# Altium PCB Bus Module.PcbDoc
Units mm, origin at the board's own origin, x right, y up, seen from the top; angles counter-clockwise.
Board outline 50 x 50 mm, 2 copper layers (Top Layer, Bottom Layer); 2 components, 26 nets, 282 pads, 72 vias.
Unrouted connection lines stored in the file: 32.
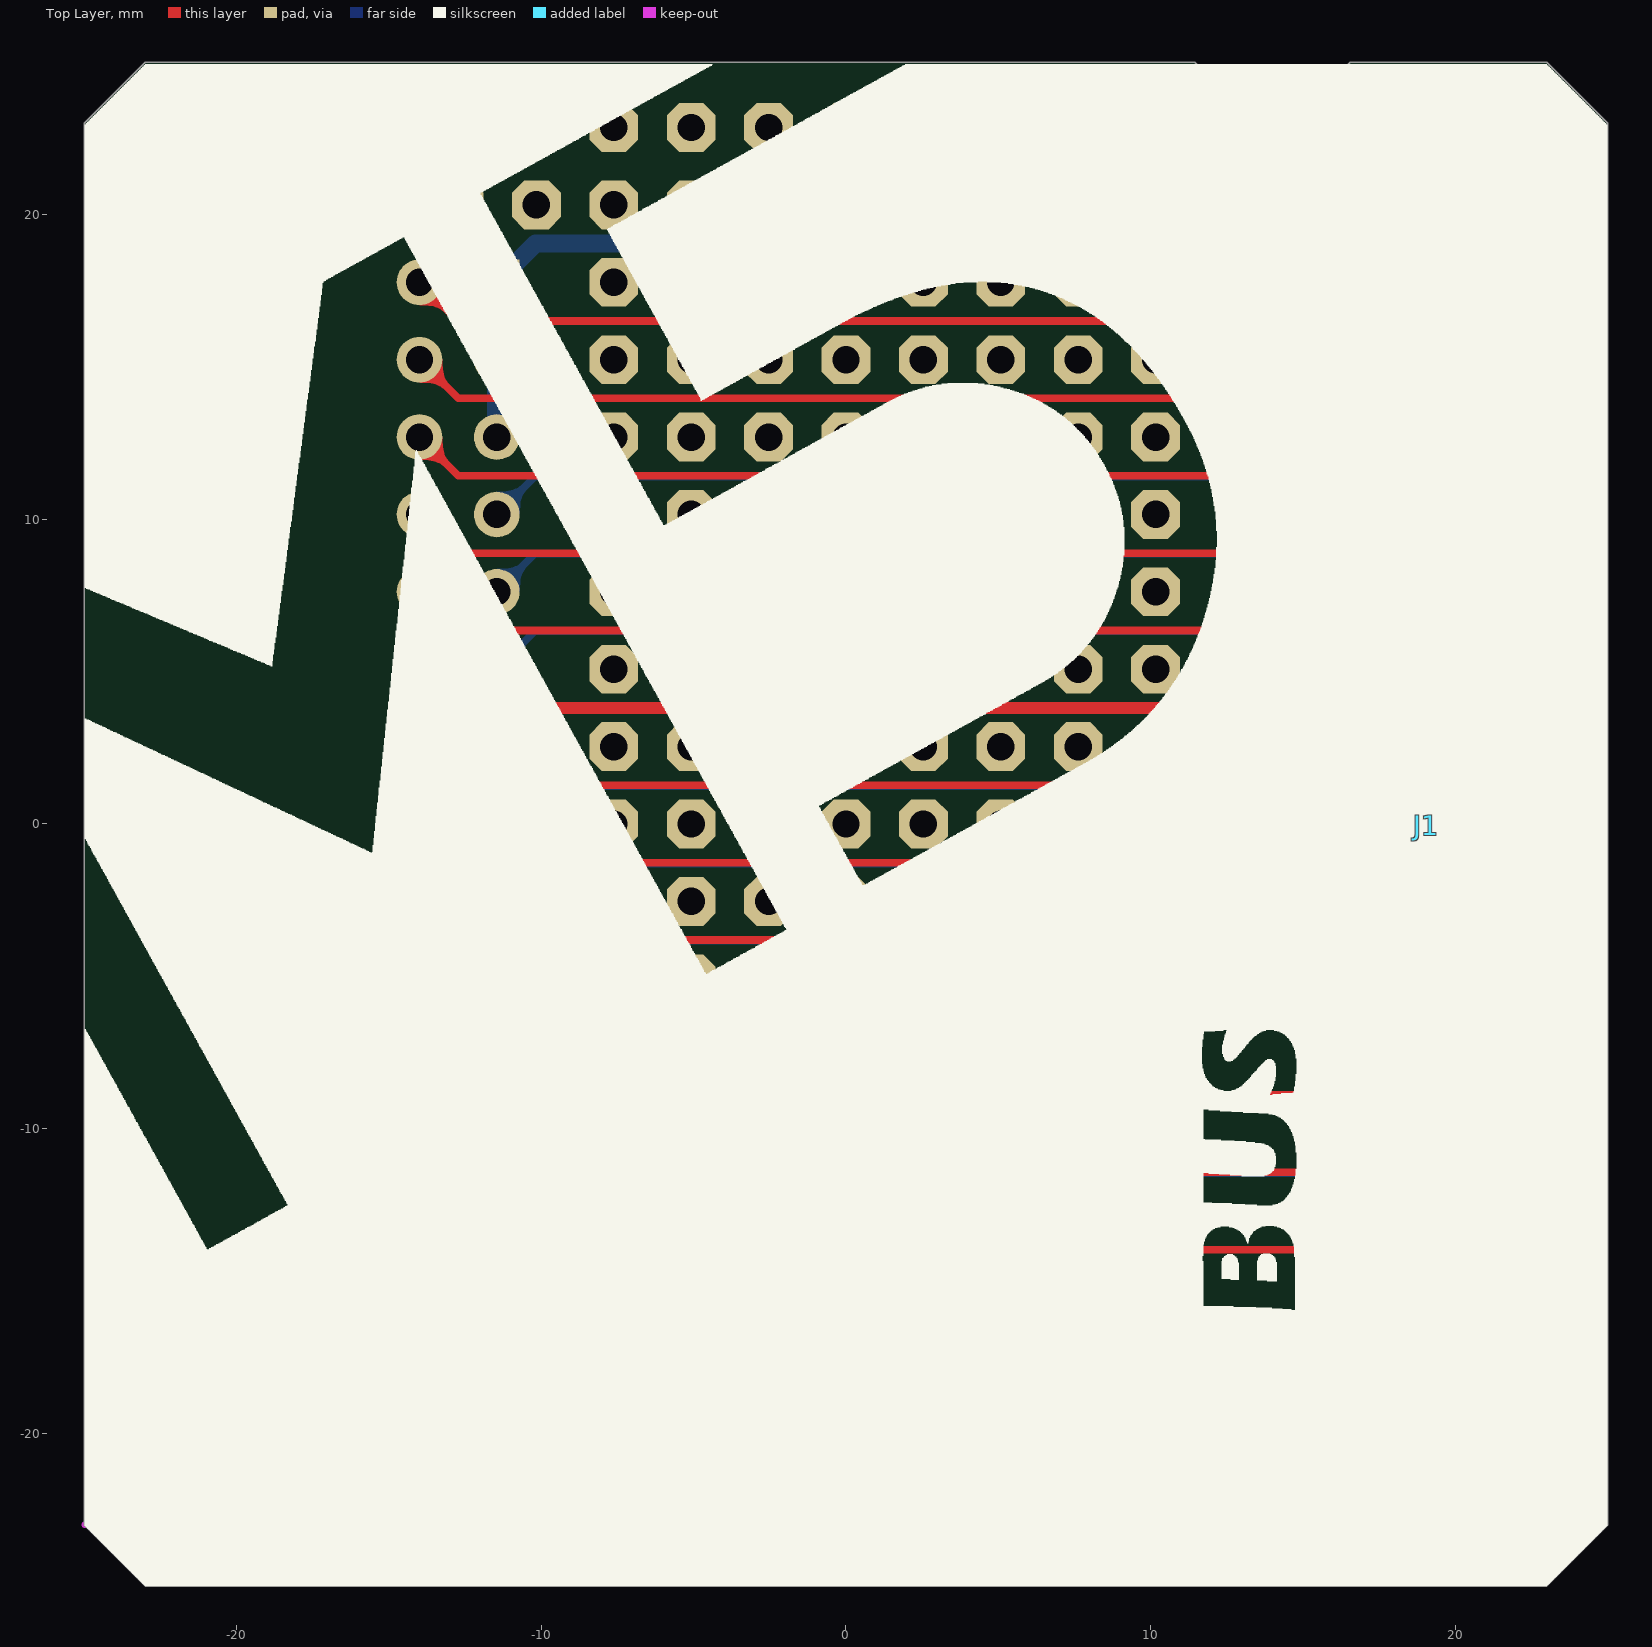
[diagram p0: Top Layer view]
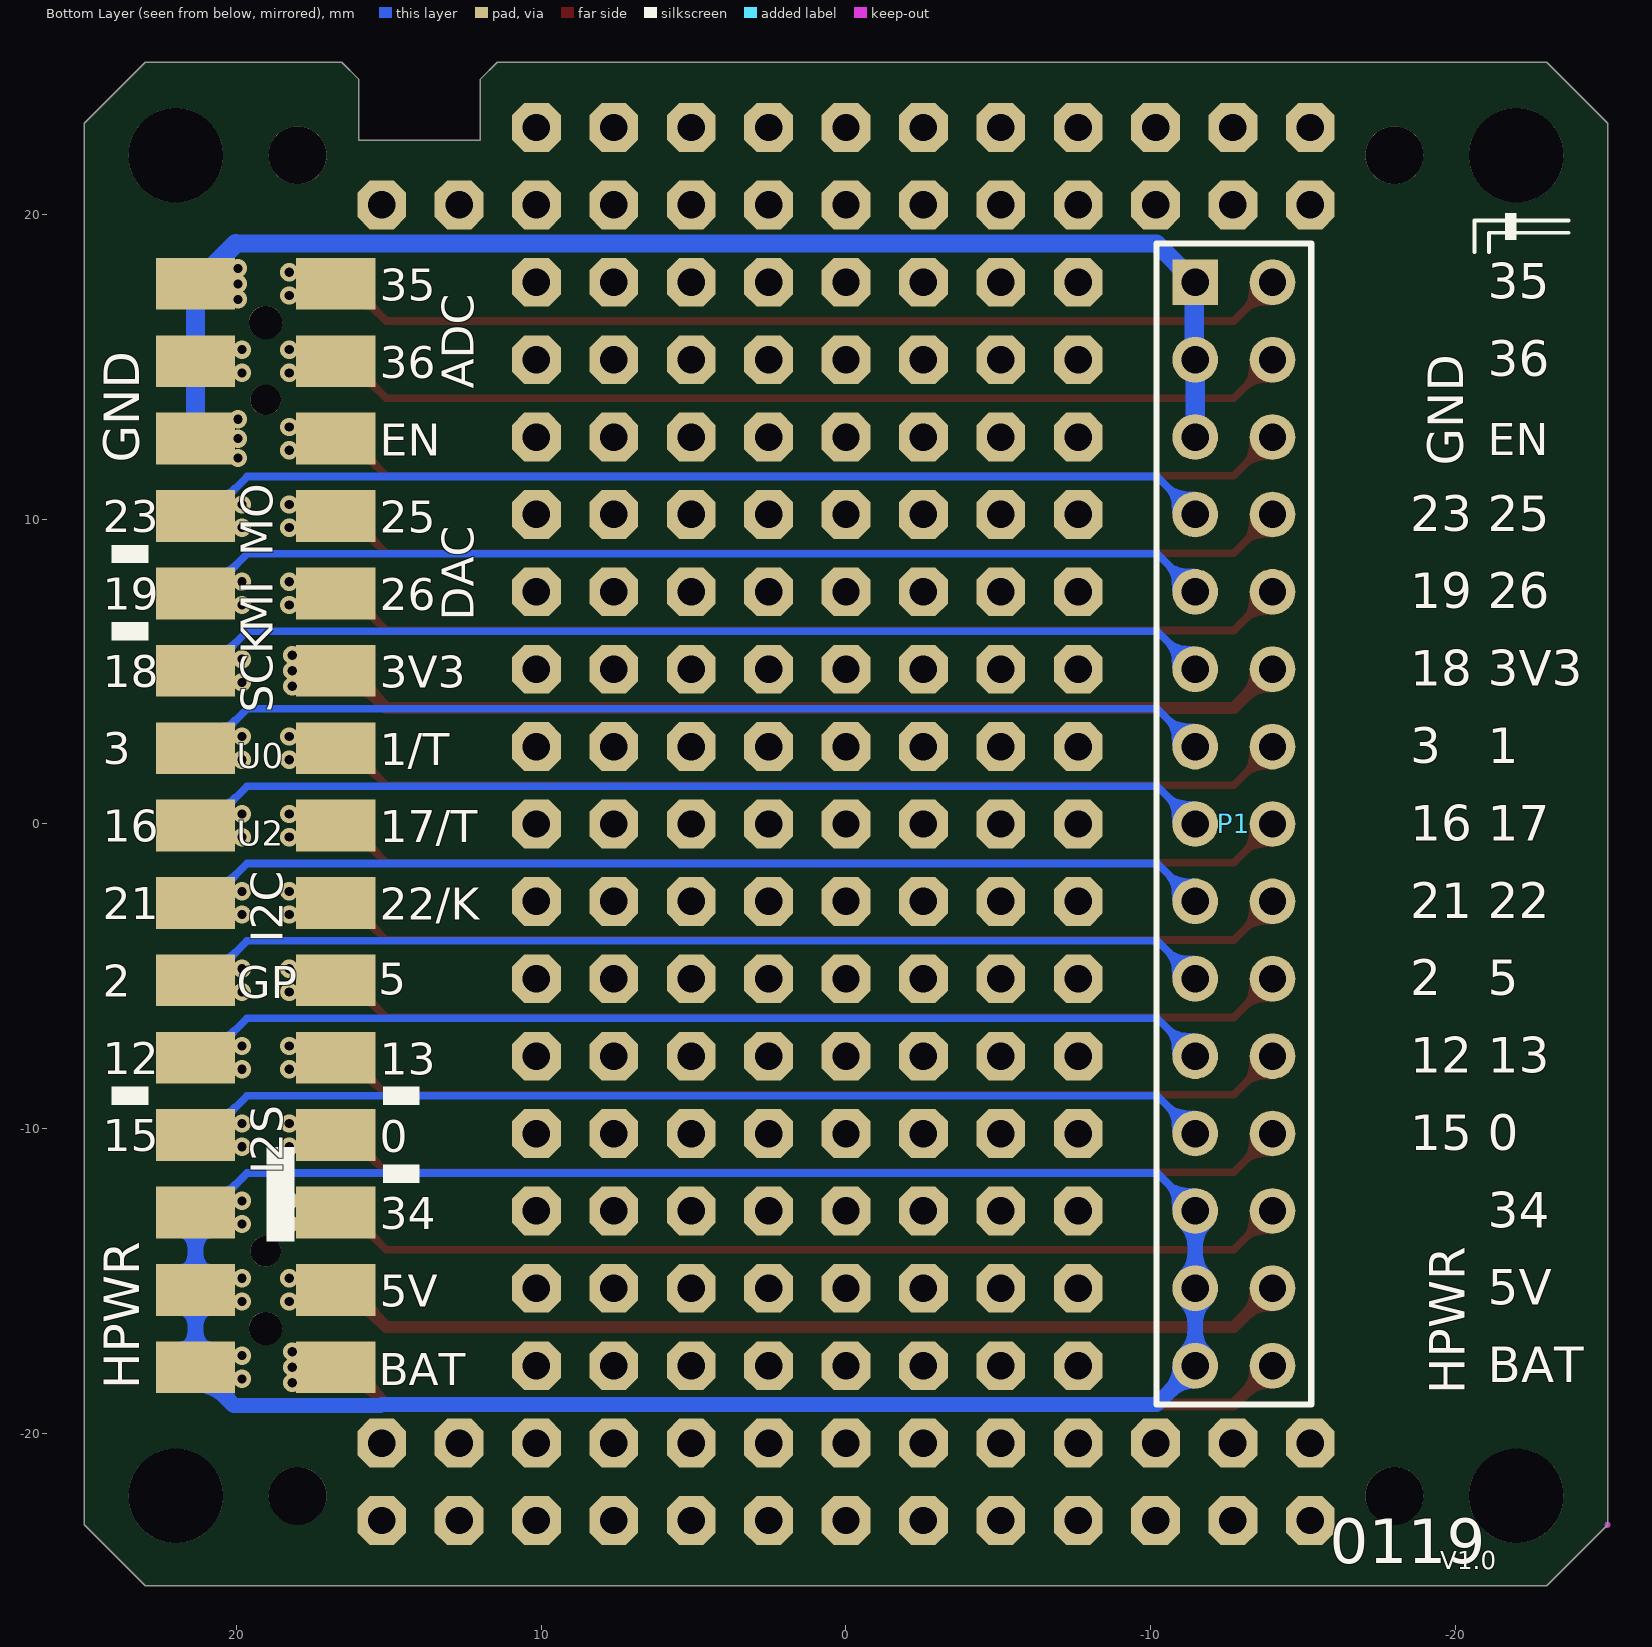
[diagram p1: Bottom Layer view, seen from below]

## Layer stack, top to bottom
Top Solder: solder mask 0.0102, Solder Resist, Dk 3.5
Top Layer: signal copper 0.0356
Dielectric1: dielectric 0.32, FR-4, Dk 4.8
Bottom Layer: signal copper 0.0356
Bottom Solder: solder mask 0.0102, Solder Resist, Dk 3.5

## Board outline
-25,-23 -23,-25 23,-25 25,-23 25,23 23,25 16.551,25 16,24.449 16,22.449 12,22.449 12,24.449 11.449,25 -23,25 -25,23

## Design rules (kind name [scope] priority, off if disabled: settings)
Clearance [All] p1: gap=0.152 ignorepadtopadclearanceinfootprint=FALSE except(0: Arc-Hole Track-Hole SMDPad-Hole THPad-Hole Via-Hole Fill-Hole Poly-Hole Region-Hole Text-Hole)
PlaneConnect [All] p1: planeconnectstyle=Direct reliefexpansion=0.508 reliefentries=4 reliefconductorwidth=0.254 reliefairgap=0.254
PolygonConnect [All] p1: connectstyle=Direct reliefconductorwidth=0.254 reliefentries=4 polygonreliefangle="90 Angle" airgapwidth=0.254
RoutingVias [All] p1: holewidth=0.711 width=1.27 viastyle="Through Hole" minholewidth=0.711 minwidth=1.27 maxholewidth=0.711 maxwidth=1.27
SolderMaskExpansion [All] p1: expansion=0.102
Width [All] p1: maxlimit=0.635 minlimit=0.152 preferedwidth=0.381 minimp=50.000000 maximp=50.000000 favimp=50.000000
29 further rules are at their usual default settings.

## Components (designator, comment, footprint, x,y, rotation, side; value= is the part's Value field where it differs from the comment)
J1 "M5Stack_BUS" M5Stack_BUS_30P 21.35,17.729 r0 top locked
P1 "Header 15X2" HDR2X15 -11.46,17.78 r270 bottom locked

## Footprints (in the part's own frame and the unit in brackets; to place one, negate y for a bottom-side part, rotate by r counter-clockwise, add the part's x,y. Pads: shape width x height; smd on the part's side, far side on the other; paste and mask are expansions set on the pad)
HDR2X15 [mm] "Connector; Header; 15x2 Position"
  rect 1.5x1.5 hole 0.9: 1(0,0)
  round 1.5 hole 0.9: 2(0,2.54) 3(2.54,0) 4(2.54,2.54) 5(5.08,0) 6(5.08,2.54) 7(7.62,0) 8(7.62,2.54) 9(10.16,0) 10(10.16,2.54) 11(12.7,0) 12(12.7,2.54) 13(15.24,0) 14(15.24,2.54) 15(17.78,0) 16(17.78,2.54) 17(20.32,0) 18(20.32,2.54) 19(22.86,0) 20(22.86,2.54) 21(25.4,0) 22(25.4,2.54) 23(27.94,0) 24(27.94,2.54) 25(30.48,0) 26(30.48,2.54) 27(33.02,0) 28(33.02,2.54) 29(35.56,0) 30(35.56,2.54)
  silkscreen extent -1.27,-1.27 36.83,3.81
M5Stack_BUS_30P [mm]
  round 1 hole 1: 0(-2.3,-3.81) 0(-2.3,-31.75)
  round 1.1 hole 1.1: 0(-2.3,-1.27) 0(-2.3,-34.29)
  rect 2.6x1.7 smd: 1(0,0) 2(-4.6,0) 3(0,-2.54) 4(-4.6,-2.54) 5(0,-5.08) 6(-4.6,-5.08) 7(0,-7.62) 8(-4.6,-7.62) 9(0,-10.16) 10(-4.6,-10.16) 11(0,-12.7) 12(-4.6,-12.7) 13(0,-15.24) 14(-4.6,-15.24) 15(0,-17.78) 16(-4.6,-17.78) 17(0,-20.32) 18(-4.6,-20.32) 19(0,-22.86) 20(-4.6,-22.86) 21(0,-25.4) 22(-4.6,-25.4) 23(0,-27.94) 24(-4.6,-27.94) 25(0,-30.48) 26(-4.6,-30.48) 27(0,-33.02) 28(-4.6,-33.02) 29(0,-35.56) 30(-4.6,-35.56)
  rect 2.6x1.7 smd far side: 1(0,0) 2(-4.6,0) 3(0,-2.54) 4(-4.6,-2.54) 5(0,-5.08) 6(-4.6,-5.08) 7(0,-7.62) 8(-4.6,-7.62) 9(0,-10.16) 10(-4.6,-10.16) 11(0,-12.7) 12(-4.6,-12.7) 13(0,-15.24) 14(-4.6,-15.24) 15(0,-17.78) 16(-4.6,-17.78) 17(0,-20.32) 18(-4.6,-20.32) 19(0,-22.86) 20(-4.6,-22.86) 21(0,-25.4) 22(-4.6,-25.4) 23(0,-27.94) 24(-4.6,-27.94) 25(0,-30.48) 26(-4.6,-30.48) 27(0,-33.02) 28(-4.6,-33.02) 29(0,-35.56) 30(-4.6,-35.56)

## Part data
P1: "Header, 15-Pin, Dual row", LatestRevisionDate=17-Jul-2002, LatestRevisionNote="Re-released for DXP Platform.", Publisher="Altium Limited"

## Free pads (board coordinates)
  round 3.1 hole 3.1: 0(-22,-22.051) 0(-22,21.949) 0(22,-22.051) 0(22,21.949)
  round 1.9 hole 1.9: 0(-18,-22.051) 0(-18,21.949) 0(18,-22.051) 0(18,21.949)
  oct 1.6x1.6 hole 0.9: 0(-15.24,-22.86) 0(-15.24,-20.32) 0(-15.24,20.32) 0(-15.24,22.86) 0(-12.7,-22.86) 0(-12.7,-22.86) 0(-12.7,-20.32) 0(-12.7,-20.32) 0(-12.7,20.32) 0(-12.7,20.32) 0(-12.7,22.86) 0(-12.7,22.86) 0(-10.16,-22.86) 0(-10.16,-22.86) 0(-10.16,-20.32) 0(-10.16,-20.32) 0(-10.16,20.32) 0(-10.16,20.32) 0(-10.16,22.86) 0(-10.16,22.86) 0(-7.62,-22.86) 0(-7.62,-22.86) 0(-7.62,-20.32) 0(-7.62,-20.32) 0(-7.62,-17.78) 0(-7.62,-15.24) 0(-7.62,-12.7) 0(-7.62,-10.16) 0(-7.62,-7.62) 0(-7.62,-5.08) 0(-7.62,-2.54) 0(-7.62,0) 0(-7.62,2.54) 0(-7.62,5.08) 0(-7.62,7.62) 0(-7.62,10.16) 0(-7.62,12.7) 0(-7.62,15.24) 0(-7.62,17.78) 0(-7.62,20.32) 0(-7.62,22.86) 0(-5.08,-22.86) 0(-5.08,-20.32) 0(-5.08,-17.78) 0(-5.08,-15.24) 0(-5.08,-12.7) 0(-5.08,-10.16) 0(-5.08,-7.62) 0(-5.08,-5.08) 0(-5.08,-2.54) 0(-5.08,0) 0(-5.08,2.54) 0(-5.08,5.08) 0(-5.08,7.62) 0(-5.08,10.16) 0(-5.08,12.7) 0(-5.08,15.24) 0(-5.08,17.78) 0(-5.08,20.32) 0(-5.08,22.86) 0(-2.54,-22.86) 0(-2.54,-20.32) 0(-2.54,-17.78) 0(-2.54,-15.24) 0(-2.54,-12.7) 0(-2.54,-10.16) 0(-2.54,-7.62) 0(-2.54,-5.08) 0(-2.54,-2.54) 0(-2.54,0) 0(-2.54,2.54) 0(-2.54,5.08) 0(-2.54,7.62) 0(-2.54,10.16) 0(-2.54,12.7) 0(-2.54,15.24) 0(-2.54,17.78) 0(-2.54,20.32) 0(-2.54,22.86) 0(0,-22.86) 0(0,-20.32) 0(0,-17.78) 0(0,-15.24) 0(0,-12.7) 0(0,-10.16) 0(0,-7.62) 0(0,-5.08) 0(0,-2.54) 0(0,0) 0(0,2.54) 0(0,5.08) 0(0,7.62) 0(0,10.16) 0(0,12.7) 0(0,15.24) 0(0,17.78) 0(0,20.32) 0(0,22.86) 0(2.54,-22.86) 0(2.54,-20.32) 0(2.54,-17.78) 0(2.54,-15.24) 0(2.54,-12.7) 0(2.54,-10.16) 0(2.54,-7.62) 0(2.54,-5.08) 0(2.54,-2.54) 0(2.54,0) 0(2.54,2.54) 0(2.54,5.08) 0(2.54,7.62) 0(2.54,10.16) 0(2.54,12.7) 0(2.54,15.24) 0(2.54,17.78) 0(2.54,20.32) 0(2.54,22.86) 0(5.08,-22.86) 0(5.08,-20.32) 0(5.08,-17.78) 0(5.08,-15.24) 0(5.08,-12.7) 0(5.08,-10.16) 0(5.08,-7.62) 0(5.08,-5.08) 0(5.08,-2.54) 0(5.08,0) 0(5.08,2.54) 0(5.08,5.08) 0(5.08,7.62) 0(5.08,10.16) 0(5.08,12.7) 0(5.08,15.24) 0(5.08,17.78) 0(5.08,20.32) 0(5.08,22.86) 0(7.62,-22.86) 0(7.62,-20.32) 0(7.62,-17.78) 0(7.62,-15.24) 0(7.62,-12.7) 0(7.62,-10.16) 0(7.62,-7.62) 0(7.62,-5.08) 0(7.62,-2.54) 0(7.62,0) 0(7.62,2.54) 0(7.62,5.08) 0(7.62,7.62) 0(7.62,10.16) 0(7.62,12.7) 0(7.62,15.24) 0(7.62,17.78) 0(7.62,20.32) 0(7.62,22.86) 0(10.16,-22.86) 0(10.16,-20.32) 0(10.16,-17.78) 0(10.16,-15.24) 0(10.16,-12.7) 0(10.16,-10.16) 0(10.16,-7.62) 0(10.16,-5.08) 0(10.16,-2.54) 0(10.16,0) 0(10.16,2.54) 0(10.16,5.08) 0(10.16,7.62) 0(10.16,10.16) 0(10.16,12.7) 0(10.16,15.24) 0(10.16,17.78) 0(10.16,20.32) 0(10.16,22.86) 0(12.7,-22.86) 0(12.7,-20.32) 0(12.7,20.32) 0(15.24,-22.86) 0(15.24,-20.32) 0(15.24,20.32)

## Via types
v1: diameter 0.6, hole 0.3, Top Layer to Bottom Layer, tented both sides, 72 vias

## Nets (pads, with @x,y where several pads share a name; then routed paths per layer and width w, separated by ;. In a path a pad name is that pad's centre, name@x,y a point inside that pad or via, vN(x,y) a via of type N, cw(c..) or ccw(c..) an arc to the next point about the centre after c; other vN are vias at no path point)
3.3V: J1.12 P1.12 | length 31.8
  Top Layer w0.4: P1.12 -12.73,3.81 15.088,3.81 16.307,5.029 J1.12@16.75,5.029
  other v1: 18.175,4.521 18.175,5.029 18.175,5.537
5V: J1.28 P1.28 | length 31.8
  Top Layer w0.4: P1.28 -12.73,-16.51 15.088,-16.51 16.307,-15.291 J1.28@16.75,-15.291
  other v1: 18.274,-15.672 18.274,-14.91
BATTERY: J1.30 P1.30 | length 31.8
  Top Layer w0.4: P1.30 -12.73,-19.05 15.088,-19.05 16.307,-17.831 J1.30@16.75,-17.831
  other v1: 18.175,-18.339 18.175,-17.831 18.175,-17.323
EN: J1.6 P1.6 | length 31.8
  Top Layer w0.254: P1.6 -12.73,11.43 15.088,11.43 16.307,12.649 J1.6@16.75,12.649
  other v1: 18.274,12.268 18.274,12.268 18.274,13.03 18.274,13.03
GND: J1.1 J1.3 J1.5 P1.1 P1.3 P1.5 | length 44.1
  Bottom Layer w0.6: P1.1@-11.43,17.81 -10.19,19.05 20.029,19.05
  Bottom Layer w0.635: P1.5 P1.3 -11.43,15.27 -11.43,17.81 P1.1 ; 20.029,19.05 21.35,17.729 21.35,15.189 J1.5@21.35,12.649
  other v1: 19.953,12.014 19.953,12.649 19.953,13.284 19.826,14.808 19.826,15.57 19.953,17.221 19.953,17.729 19.953,18.237
GPIO0: J1.24 P1.24 | length 31.8
  Top Layer w0.254: P1.24 -12.73,-11.43 15.088,-11.43 16.307,-10.211 J1.24@16.75,-10.211
  other v1: 18.274,-10.592 18.274,-9.83
GPIO1: J1.14 P1.14 | length 31.8
  Top Layer w0.254: P1.14 -12.73,1.27 15.088,1.27 16.307,2.489 J1.14@16.75,2.489
  other v1: 18.274,2.108 18.274,2.87
GPIO2: J1.19 P1.19 | length 33.9
  Bottom Layer w0.25: P1.19 -10.215,-3.835 19.66,-3.835 20.955,-5.131 J1.19@21.35,-5.131
  other v1: 19.826,-5.512 19.826,-4.75
GPIO3: J1.13 P1.13 | length 33.9
  Bottom Layer w0.25: P1.13 -10.215,3.785 19.66,3.785 20.955,2.489 J1.13@21.35,2.489
  other v1: 19.826,2.108 19.826,2.87
GPIO5: J1.20 P1.20 | length 31.8
  Top Layer w0.254: P1.20 -12.73,-6.35 15.088,-6.35 16.307,-5.131 J1.20@16.75,-5.131
  other v1: 18.274,-5.512 18.274,-4.75
GPIO12: J1.21 P1.21 | length 33.9
  Bottom Layer w0.25: P1.21 -10.215,-6.375 19.66,-6.375 20.955,-7.671 J1.21@21.35,-7.671
  other v1: 19.826,-8.052 19.826,-7.29
GPIO13: J1.22 P1.22 | length 31.8
  Top Layer w0.254: P1.22 -12.73,-8.89 15.088,-8.89 16.307,-7.671 J1.22@16.75,-7.671
  other v1: 18.274,-8.052 18.274,-7.29
GPIO15: J1.23 P1.23 | length 33.9
  Bottom Layer w0.25: P1.23 -10.215,-8.915 19.66,-8.915 20.955,-10.211 J1.23@21.35,-10.211
  other v1: 19.826,-10.592 19.826,-9.83
GPIO16: J1.15 P1.15 | length 33.9
  Bottom Layer w0.25: P1.15 -10.215,1.245 19.66,1.245 20.955,-0.051 J1.15@21.35,-0.051
  other v1: 19.826,-0.432 19.826,0.33
GPIO17: J1.16 P1.16 | length 31.8
  Top Layer w0.254: P1.16 -12.73,-1.27 15.088,-1.27 16.307,-0.051 J1.16@16.75,-0.051
  other v1: 18.274,-0.432 18.274,0.33
GPIO18: J1.11 P1.11 | length 33.9
  Bottom Layer w0.25: P1.11 -10.215,6.325 19.66,6.325 20.955,5.029 J1.11@21.35,5.029
  other v1: 19.826,4.648 19.826,5.41
GPIO19: J1.9 P1.9 | length 33.9
  Bottom Layer w0.25: P1.9 -10.215,8.865 19.66,8.865 20.955,7.569 J1.9@21.35,7.569
  other v1: 19.826,7.188 19.826,7.188 19.826,7.95 19.826,7.95
GPIO21: J1.17 P1.17 | length 33.9
  Bottom Layer w0.25: P1.17 -10.215,-1.295 19.66,-1.295 20.955,-2.591 J1.17@21.35,-2.591
  other v1: 19.826,-2.972 19.826,-2.21
GPIO22: J1.18 P1.18 | length 31.8
  Top Layer w0.254: P1.18 -12.73,-3.81 15.088,-3.81 16.307,-2.591 J1.18@16.75,-2.591
  other v1: 18.274,-2.972 18.274,-2.21
GPIO23: J1.7 P1.7 | length 33.9
  Bottom Layer w0.25: P1.7 -10.215,11.405 19.66,11.405 20.955,10.109 J1.7@21.35,10.109
  other v1: 19.826,9.728 19.826,9.728 19.826,10.49 19.826,10.49
GPIO25: J1.8 P1.8 | length 31.8
  Top Layer w0.254: P1.8 -12.73,8.89 15.088,8.89 16.307,10.109 J1.8@16.75,10.109
  other v1: 18.274,9.728 18.274,9.728 18.274,10.49 18.274,10.49
GPIO26: J1.10 P1.10 | length 31.8
  Top Layer w0.254: P1.10 -12.73,6.35 15.088,6.35 16.307,7.569 J1.10@16.75,7.569
  other v1: 18.274,7.188 18.274,7.95
GPIO34: J1.26 P1.26 | length 31.8
  Top Layer w0.254: P1.26 -12.73,-13.97 15.088,-13.97 16.307,-12.751 J1.26@16.75,-12.751
  other v1: 18.274,-13.132 18.274,-12.37
GPIO35: J1.2 P1.2 | length 31.8
  Top Layer w0.254: P1.2 -12.73,16.51 15.088,16.51 16.307,17.729 J1.2@16.75,17.729
  other v1: 18.274,17.348 18.274,18.11
GPIO36: J1.4 P1.4 | length 31.8
  Top Layer w0.254: P1.4 -12.73,13.97 15.088,13.97 16.307,15.189 J1.4@16.75,15.189
  other v1: 18.274,14.808 18.274,15.57
HPWR: J1.25 J1.27 J1.29 P1.25 P1.27 P1.29 | length 77.9
  Bottom Layer w0.25: P1.25 -10.215,-11.455 19.66,-11.455 20.955,-12.751 J1.25@21.35,-12.751
  Bottom Layer w0.5: P1.25 P1.27 P1.29 -10.19,-19.05 15.25,-19.05 15.283,-19.083 20.098,-19.083 21.35,-17.831 21.35,-15.291 J1.25@21.35,-12.751
  other v1: 19.826,-18.212 19.826,-17.45 19.826,-15.672 19.826,-14.91 19.826,-13.132 19.826,-12.37
pads on no net: J1.0

## Keep-outs
Keep-Out Layer:
  lines w0.2: -25,-23 -25,-23

## Silkscreen, mask and mechanical layers (free items; w line width, h text height)
Top Overlay:
  drawing of 5550 lines, arcs and shapes, not listed
Bottom Overlay:
  region: -21.996,19.177 -21.996,20.041 -21.641,20.041 -21.641,19.177
  lines w0.127: -23.724,19.406 -21.107,19.406 -21.107,18.771 ; -23.724,19.812 -20.625,19.812 -20.625,18.771
  text "35" at -21.057,16.84 h2
  text "36" at -21.057,14.3 h2
  text "EN" at -21.057,11.76 h1.8
  text "GND" at -20.65,11.76 h2 r270
  text "25" at -21.057,9.22 h2
  text "23" at -18.517,9.22 h2
  text "26" at -21.057,6.68 h2
  text "19" at -18.517,6.68 h2
  text "3V3" at -21.057,4.14 h2
  text "18" at -18.517,4.14 h2
  text "1" at -21.057,1.6 h2
  text "3" at -18.517,1.6 h2
  text "17" at -21.057,-0.94 h2
  text "16" at -18.517,-0.94 h2
  text "22" at -21.057,-3.48 h2
  text "21" at -18.517,-3.48 h2
  text "5" at -21.057,-6.02 h2
  text "2" at -18.517,-6.02 h2
  text "13" at -21.057,-8.56 h2
  text "12" at -18.517,-8.56 h2
  text "0" at -21.057,-11.1 h2
  text "15" at -18.517,-11.1 h2
  text "34" at -21.057,-13.64 h2
  text "5V" at -21.057,-16.18 h2
  text "BAT" at -21.057,-18.72 h2
  text "HPWR" at -20.701,-18.72 h2 r270
  text "V1.0" at -19.507,-24.663 h1
  text "0119" at -15.875,-24.74 h2.5
Mechanical 1:
  lines w0.127: -25,-23 -25,23 -23,25 11.449,25 12,24.449 12,22.449 16,22.449 16,24.449 16.551,25 23,25 25,23 25,-23 23,-25 -23,-25 -25,-23 ; 0,-25 0,-25

## Text inside footprints (layer, text, board x,y; h text height)
J1: Bottom Overlay "5" at 15.35,-5.951 h1.8; Bottom Overlay "BAT" at 15.342,-18.771 h1.8; Bottom Overlay "3V3" at 15.3,4.129 h1.8; Bottom Overlay "I2S" at 18.15,-11.501 h1.8 r270; Bottom Overlay "26" at 15.3,6.669 h1.8; Bottom Overlay "EN" at 15.3,11.749 h1.8; Bottom Overlay "21" at 24.4,-3.471 h1.8; Bottom Overlay "25" at 15.3,9.209 h1.8; Bottom Overlay "13" at 15.3,-8.571 h1.8; Bottom Overlay "23" at 24.4,9.229 h1.8; Bottom Overlay "12" at 24.4,-8.551 h1.8; Bottom Overlay "U2" at 20,-0.991 h1.4; Bottom Overlay "35" at 15.3,16.829 h1.8; Bottom Overlay "18" at 24.4,4.149 h1.8; Bottom Overlay "GND" at 22.8,11.849 h2 r270; Bottom Overlay "0" at 15.3,-11.111 h1.8; Bottom Overlay "19" at 24.4,6.689 h1.8; Bottom Overlay "SCK" at 18.475,3.649 h1.8 r270; Bottom Overlay "5V" at 15.3,-16.191 h1.8; Bottom Overlay "HPWR" at 22.8,-18.551 h2 r270; Bottom Overlay "15" at 24.4,-11.091 h1.8; Bottom Overlay "MI" at 18.475,6.289 h1.8 r270; Bottom Overlay "DAC" at 11.875,6.669 h1.8 r270; Bottom Overlay "GP" at 20,-6.071 h1.8; Bottom Overlay "1/T" at 15.3,1.589 h1.8; Bottom Overlay "36" at 15.3,14.289 h1.8; Bottom Overlay "17/T" at 15.3,-0.951 h1.8; Bottom Overlay "22/K" at 15.3,-3.491 h1.8; Bottom Overlay "U0" at 20,1.549 h1.4; Bottom Overlay "34" at 15.3,-13.651 h1.8; Bottom Overlay "16" at 24.4,-0.931 h1.8; Bottom Overlay "I2C" at 18.15,-3.901 h1.8 r270; Bottom Overlay "ADC" at 11.875,14.289 h1.8 r270; Bottom Overlay "3" at 24.4,1.609 h1.8; Bottom Overlay "2" at 24.4,-6.011 h1.8; Bottom Overlay "MO" at 18.475,8.789 h1.8 r270